# EAGLE board Shield_Slave_2_layers_2 (EAGLE 9.1.0)
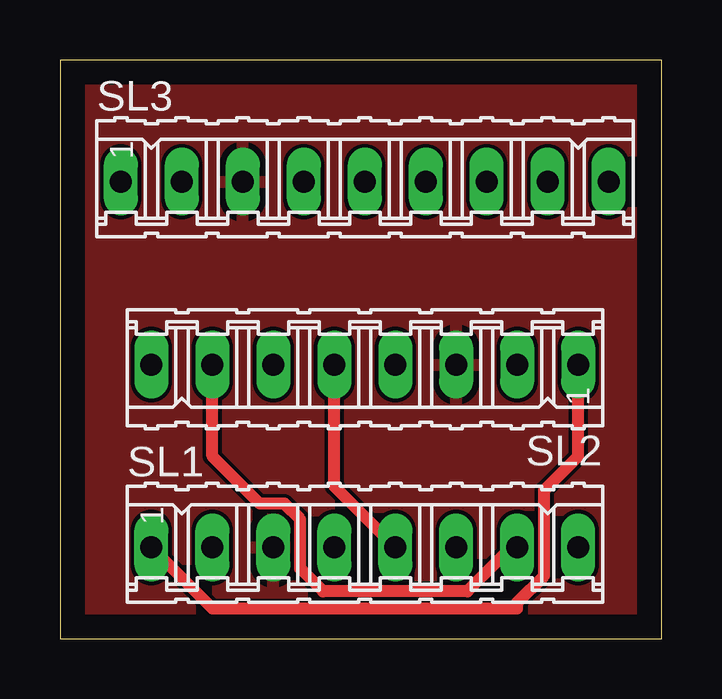
[diagram p0: board, top side]
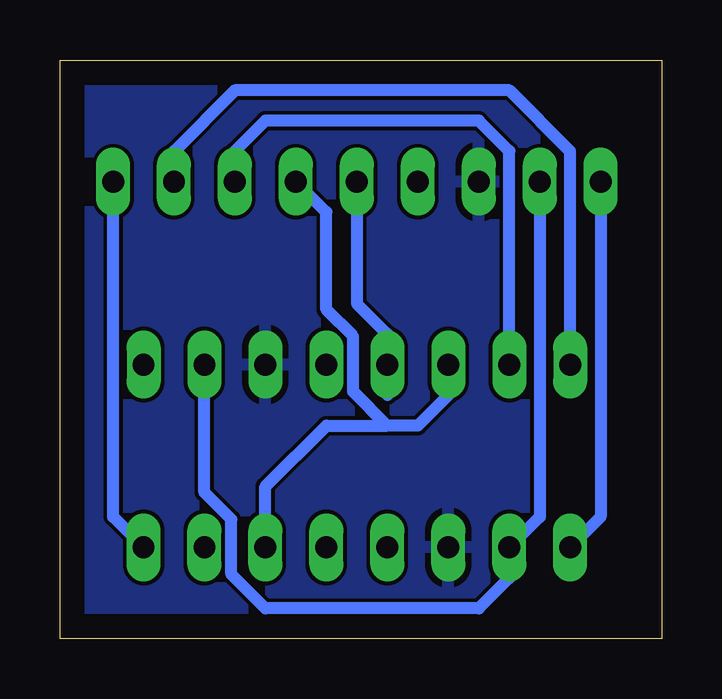
[diagram p1: board, bottom side, seen from below]

Size 25.07 x 24.12 mm. Coordinates in mm from the lower left corner, seen from the top.
Outline: 0,0 25.07,0 25.07,24.12 0,24.12 0,0
Copper layers (1*16): Top 0.035mm / dielectric 1.5mm / Bottom 0.035mm
Design rules "default": minimum track width 6mil, minimum drill 0.35mm, track to track 6mil, track to pad 6mil, pad to pad 6mil, via to via 6mil, smd to smd 6mil, copper to edge 40mil, drill to drill 6mil, minimum pad ring 10mil, minimum via ring 8mil, stop-mask expansion 4mil, vias tented up to drill 0mil, thermal gap 10mil

## Footprints (pad centres in the part's own frame; a part is rotated, then mirrored left to right if it is on the bottom)
08P = drill 0.914 long: 1 -8.89,0; 2 -6.35,0; 3 -3.81,0; 4 -1.27,0; 5 1.27,0; 6 3.81,0; 7 6.35,0; 8 8.89,0
09P = drill 0.914 long: 1 -10.16,0; 2 -7.62,0; 3 -5.08,0; 4 -2.54,0; 5 0,0; 6 2.54,0; 7 5.08,0; 8 7.62,0; 9 10.16,0

## Placement (x,y rotation side)
SL1  [08P]  12.7,3.81 0 top
SL2  [08P]  12.7,11.43 180 top
SL3  [09P]  12.7,19.05 0 top

## Library data of the parts
SL1-SL3 = con-amp-quick; OC_FARNELL: unknown; OC_NEWARK: unknown

## Nets
3V3: SL1.1 SL2.1 SL3.1
GND: SL1.3 SL2.3 SL3.3
MISO: SL1.5 SL2.5 SL3.5
MOSI: SL1.6 SL2.6 SL3.6
RST: SL1.2 SL2.2 SL3.2
SCK: SL1.7 SL2.7 SL3.7
SDA1: SL2.8 SL3.8
SDA2: SL1.8 SL3.9

## Tracks (layer width: path | path; a pad name or v marks a point on that pad's centre or on a via)
3V3
  Top 0.508: SL1.1 6.35,1.27 19.05,1.27 19.05,1.52 20.17,2.64 20.17,6.2 21.59,7.62 SL2.1
  Bottom 0.508: SL1.1 2.54,5.08 SL3.1
GND
  pour Top: 0,24.13 0,0 25.4,0 25.4,24.13
  pour Bottom: 0,24.13 0,0 25.4,0 25.4,24.13
MISO
  Top 0.508: SL1.5 11.43,6.35 SL2.5
  Bottom 0.508: 12.7,17.78 SL3.5 12.7,13.97 11.43,12.7 SL2.5 11.43,10.16
MOSI
  Bottom 0.508: SL2.6 8.89,10.16 10.16,8.89 11.43,8.89 | 11.43,8.89 12.85,10.31 12.85,12.6 13.97,13.72 13.97,17.78 SL3.6 | SL1.6 16.51,6.35 13.97,8.89 11.43,8.89
RST
  Bottom 0.508: SL3.2 5.08,5.08 SL1.2 6.35,2.54 7.62,1.27 16.51,1.27 17.93,2.69 17.93,4.98 19.05,6.1 SL2.2
SCK
  Top 0.508: SL1.7 18.8,3.81 16.97,1.98 10.97,1.98 10.01,2.94 10.01,4.98 9.35,5.64 8.33,5.64 6.35,7.62 SL2.7
  Bottom 0.508: SL2.7 6.35,20.32 7.62,21.59 16.51,21.59 17.78,20.32 SL3.7
SDA1
  Bottom 0.508: SL2.8 3.81,20.32 6.34,22.85 17.79,22.85 20.32,20.32 SL3.8
SDA2
  Bottom 0.508: SL1.8 22.86,5.08 SL3.9